# EAGLE board MaTouch ESP32-P4 TFT with Touch 10.1“ V1.0 (EAGLE 6.1), part 1 of 3
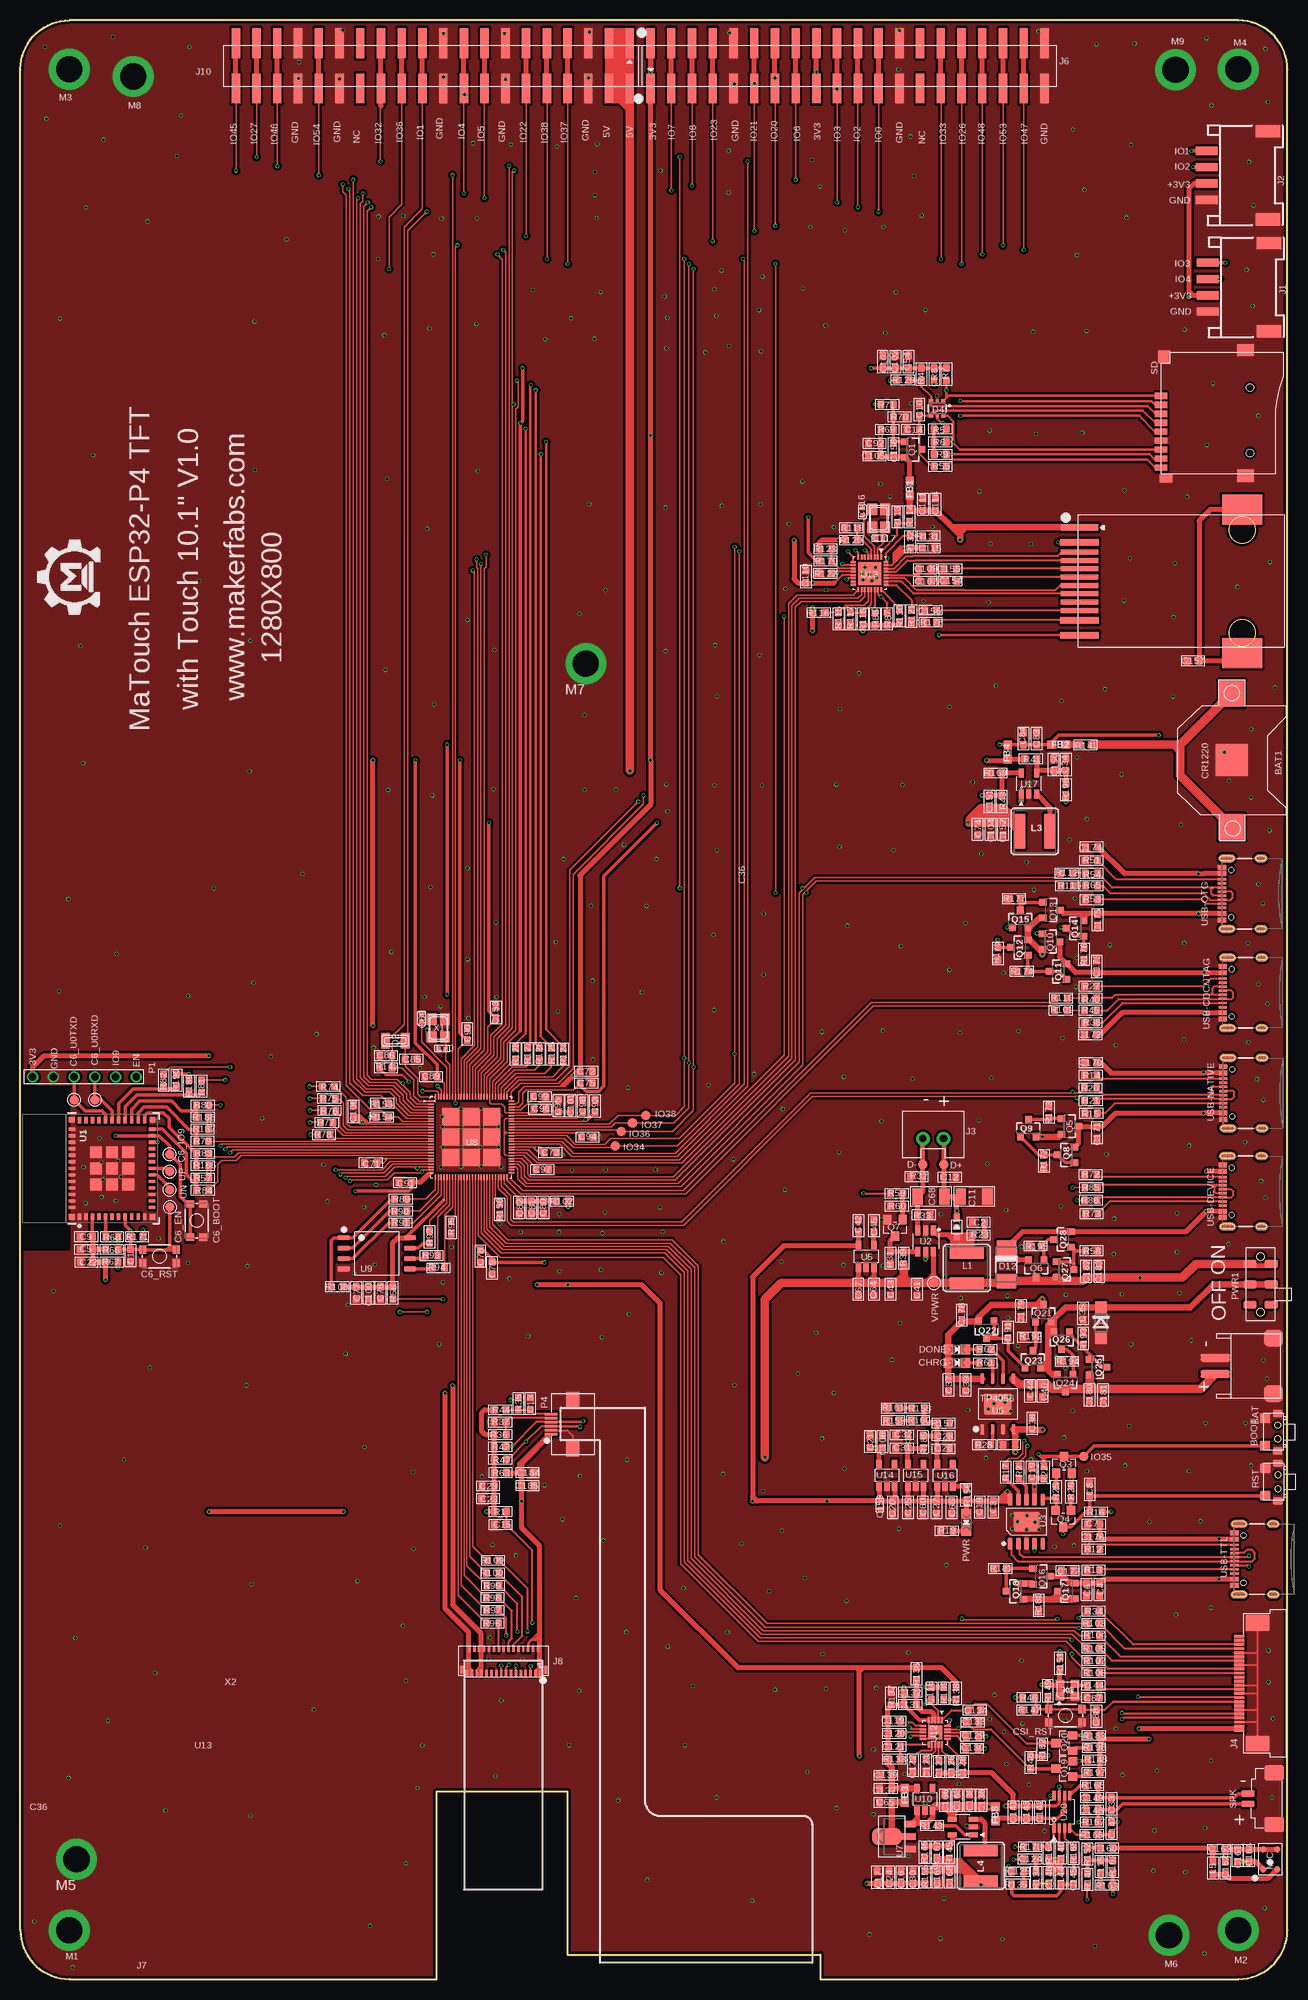
[diagram p0: board, top side]
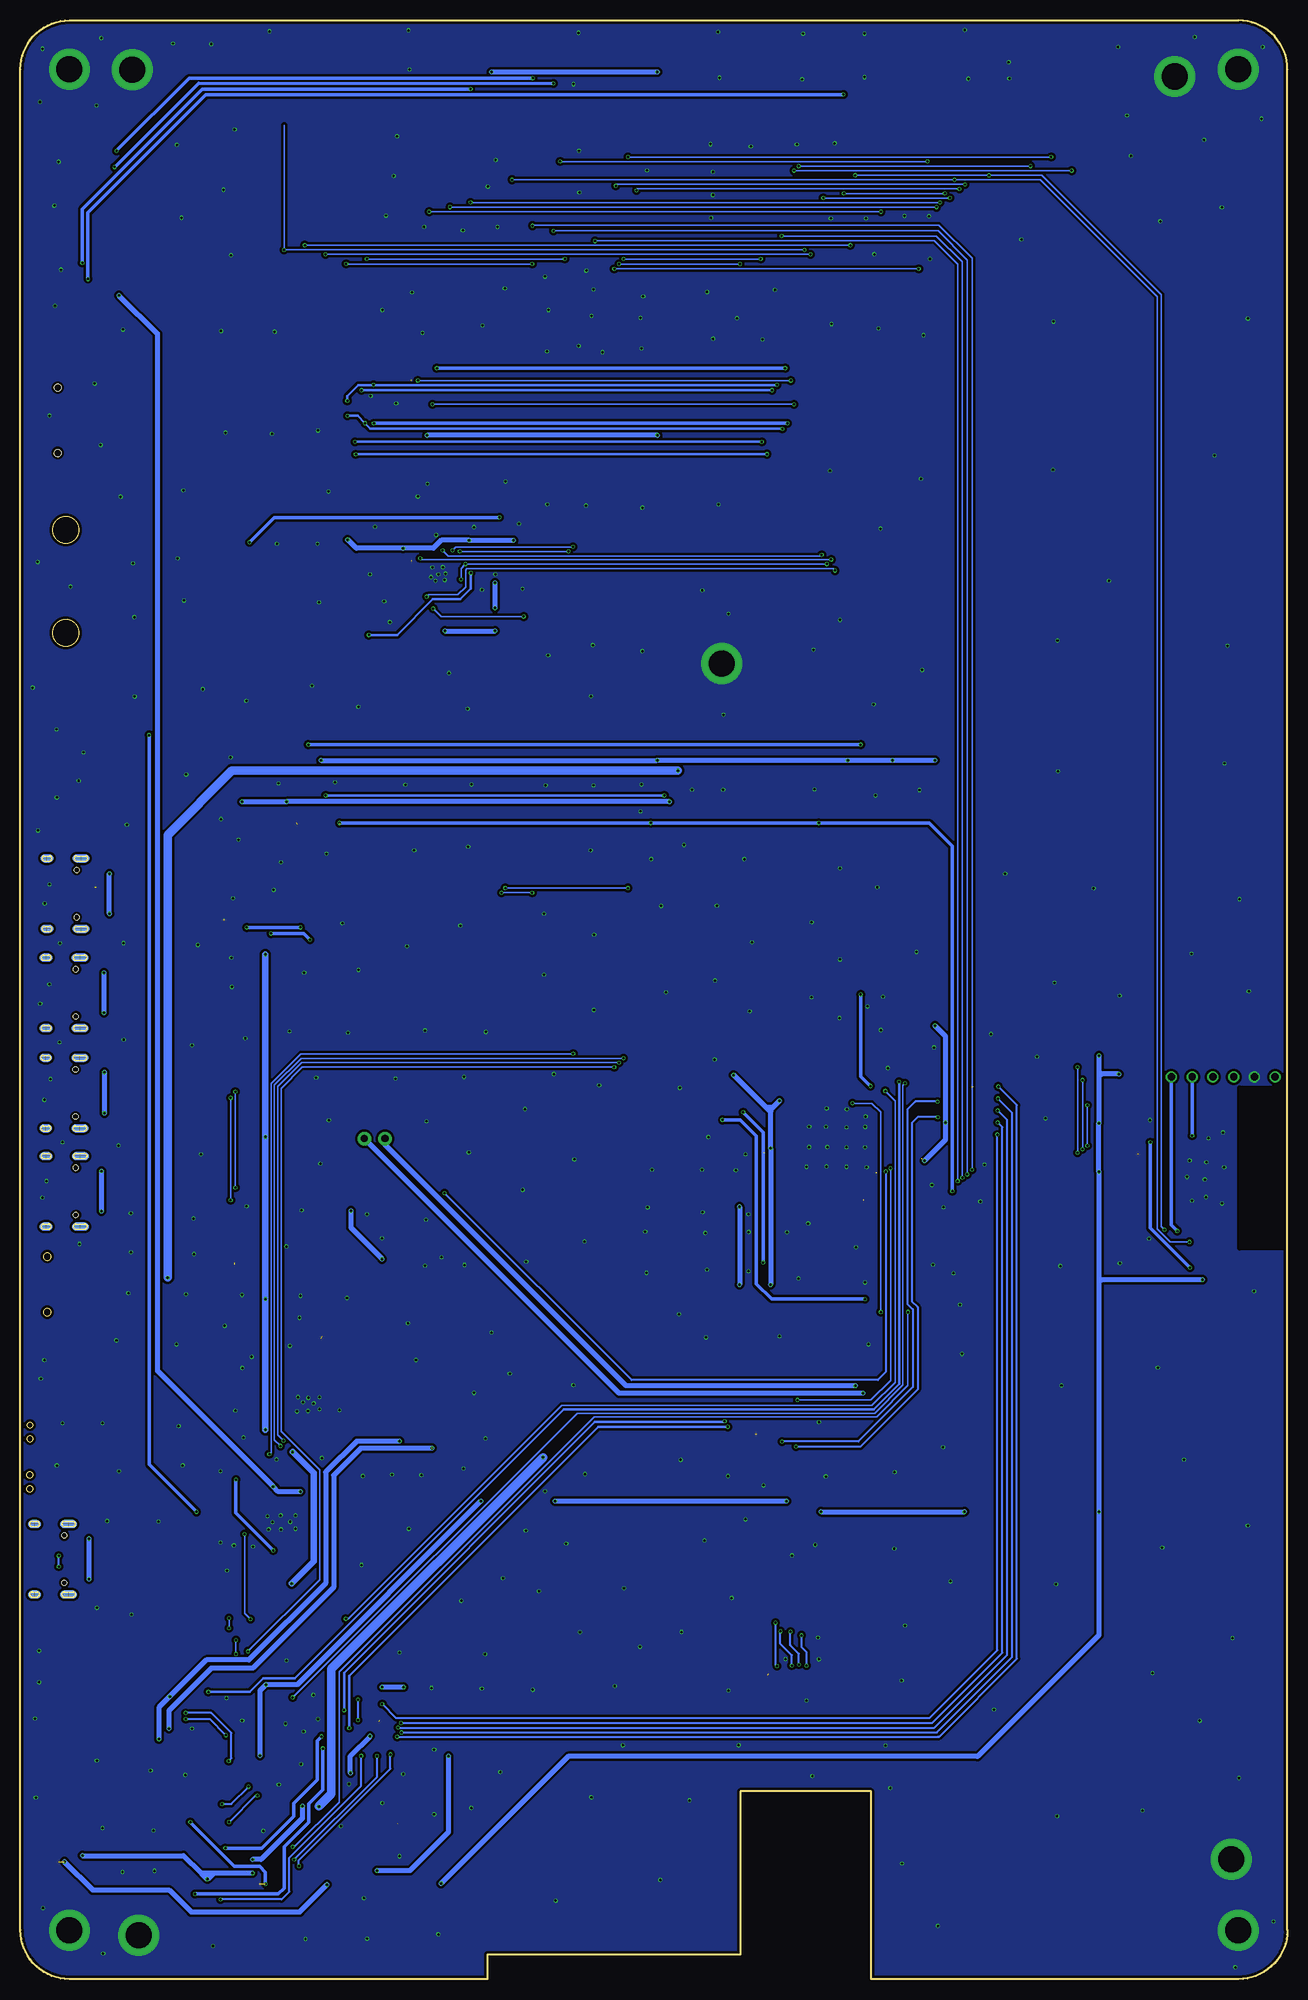
[diagram p1: board, bottom side, seen from below]

Size 155.2 x 240 mm. Coordinates in mm from the lower left corner, seen from the top.
Outline: 67,23 51,23 51,0 6,0 arc-90 0,6 0,234 arc-90 6,240 149.2,240 arc-90 155.2,234 155.2,6 arc-90 149.2,0 98,0 98,3 67,3 67,22.96
Copper layers (1*16): Top 0.035mm / dielectric 1.5mm / Bottom 0.035mm
Design rules: minimum track width 7mil, minimum drill 10mil, track to track 6mil, track to pad 6mil, pad to pad 6mil, via to via 6mil, smd to smd 0mil, copper to edge 6mil, drill to drill 6mil, minimum pad ring 3mil, minimum via ring 3mil, stop-mask expansion 2mil, vias tented up to drill 100mil, thermal gap 0mil
Net classes: 0 default: drill 0.305 mm; 1 vbat: drill 0.305 mm
tRestrict: area 0.1,89.6 to 5.8,109.2
bRestrict: area 0.1,89.6 to 5.8,109.2

## Footprints (pad centres in the part's own frame; a part is rotated, then mirrored left to right if it is on the bottom)
HW2-SMD-2.0-90D = smd 2 x 2.4: 3 3.4,-2.181; 4 -3.4,-2.181 | smd 1 x 3.6: + -1,4.953; - 1,4.953
CR1220-SMD = smd 3.2 x 3.2: +$1 -8.2,0; +$2 8.2,0 | smd 3.9 x 3.9: - 0,0
2*4*3.5MM = smd 1.15 x 1.3: 1 -1.675,0; 2 1.675,0 | smd 0.9 x 1.2: 3 2.3,1.55; 4 -2.3,1.55
C0603 = smd 0.889 x 0.889: 1 -0.762,0; 2 0.762,0
DISCRETE_C0603 = smd 0.889 x 0.889: 1 -0.762,0; 2 0.762,0
TACTILE_SWITCH_SMD_4.6X2.8MM = smd 0.9 x 1: 1 -2.05,-0.8; 2 2.05,-0.8; 3 2.05,0.8; 4 -2.05,0.8
TP_4545 = smd 1.143 x 1.143: T 0,0
DISCRETE_C1206 = smd 1.27 x 2.032: 1 -1.651,0; 2 1.651,0
DISCRETE_C0402 = smd 0.635 x 0.635: 1 -0.445,0; 2 0.445,0
C0402 = smd 0.635 x 0.635: 1 0,0.484; 2 0,-0.484
C0603' = smd 0.889 x 0.889: 1 0,0.762; 2 0,-0.762
CHIPLED_0805_NOOUTLINE = smd 1.2 x 1.2: A 0,-1.05; C 0,1.05
SOD323 = smd 1 x 0.8: + -1.2,0; - 1.2,0
SOD123 = smd 1.4 x 1.4: A 1.9,0; C -1.9,0
SOT363 = smd 0.5 x 0.5: 1 -0.75,-0.9; 3 0.75,-0.9; 4 0.75,0.9; 6 -0.75,0.9 | smd 0.4 x 0.5: 2 0,-0.9; 5 0,0.9
DO-214AC = smd 1.8 x 2.4: A 2.025,0; C -2.025,0
TP-D45MIL = smd 1.143 x 1.143: T 0,0
0603 = smd 1.1 x 1: 1 -0.85,0; 2 0.85,0
HW4-SMD-2.0-90D = smd 1.01 x 2.74: 1 -3,-0.1; 2 -1,-0.1; 3 1,-0.1; 4 3,-0.1 | smd 1.5 x 3: SS1 -5.4,7.4; SS2 5.4,7.4
XH2.54-2P = drill 0.9 pad 1.651: 1 -1.27,0; 2 1.27,0
SMD26-50P-1760L450W = smd 0.3 x 1.3: 1 5.75,0; 2 5.25,0; 3 4.75,0; 4 4.25,0; 5 3.75,0; 6 3.25,0; 7 2.75,0; 8 2.25,0; 9 1.75,0; 10 1.25,0; 11 0.75,0; 12 0.25,0; 13 -0.25,0; 14 -0.75,0; 15 -1.25,0; 16 -1.75,0; 17 -2.25,0; 18 -2.75,0; 19 -3.25,0; 20 -3.75,0; 21 -4.25,0; 22 -4.75,0; 23 -5.25,0; 24 -5.75,0 | smd 2 x 3: 25 -7.4,-2.25; 26 7.4,-2.25
SMD2X20-254P-5080L750W920H = smd 1.02 x 3.65: 1 -24.13,-2.775; 2 -24.13,2.775; 3 -21.59,-2.775; 4 -21.59,2.775; 5 -19.05,-2.775; 6 -19.05,2.775; 7 -16.51,-2.775; 8 -16.51,2.775; 9 -13.97,-2.775; 10 -13.97,2.775; 11 -11.43,-2.775; 12 -11.43,2.775; 13 -8.89,-2.775; 14 -8.89,2.775; 15 -6.35,-2.775; 16 -6.35,2.775; 17 -3.81,-2.775; 18 -3.81,2.775; 19 -1.27,-2.775; 20 -1.27,2.775; 21 1.27,-2.775; 22 1.27,2.775; 23 3.81,-2.775; 24 3.81,2.775; 25 6.35,-2.775; 26 6.35,2.775; 27 8.89,-2.775; 28 8.89,2.775; 29 11.43,-2.775; 30 11.43,2.775; 31 13.97,-2.775; 32 13.97,2.775; 33 16.51,-2.775; 34 16.51,2.775; 35 19.05,-2.775; 36 19.05,2.775; 37 21.59,-2.775; 38 21.59,2.775; 39 24.13,-2.775; 40 24.13,2.775
HR961160C = smd 0.81 x 4.6: 1 -6.61,-9.961 | smd 0.81 x 4.77: 2 -4.77,-9.961; 11 4.77,-9.961; 12 6.61,-9.961 | smd 0.61 x 4.6: 3 -3.57,-9.961; 4 -2.55,-9.961; 5 -1.53,-9.961; 6 -0.51,-9.961; 7 0.51,-9.961; 8 1.53,-9.961; 9 2.55,-9.961; 10 3.57,-9.961 | smd 3.7 x 4.9: 13 8.799,9.961; 14 -8.799,9.961
SMD31-30P-1090L320W100H = smd 0.3 x 0.8: 1 4.5,-1.475; 3 3.9,-1.475; 5 3.3,-1.475; 7 2.7,-1.475; 9 2.1,-1.475; 11 1.5,-1.475; 13 0.9,-1.475; 15 0.3,-1.475; 17 -0.3,-1.475; 19 -0.9,-1.475; 21 -1.5,-1.475; 23 -2.1,-1.475; 25 -2.7,-1.475; 27 -3.3,-1.475; 29 -3.9,-1.475; 31 -4.5,-1.475 | smd 0.3 x 0.65: 2 4.2,1.4; 4 3.6,1.4; 6 3,1.4; 8 2.4,1.4; 10 1.8,1.4; 12 1.2,1.4; 14 0.6,1.4; 16 0,1.4; 18 -0.6,1.4; 20 -1.2,1.4; 22 -1.8,1.4; 24 -2.4,1.4; 26 -3,1.4; 28 -3.6,1.4; 30 -4.2,1.4 | smd 0.4 x 0.95: 32 5.15,-1.103; 33 -5.15,-1.103
CR54 = smd 4.2 x 1.4: P$1 0,1.85; P$2 0,-1.85
L0603 = smd 0.889 x 0.889: 1 -0.762,0; 2 0.762,0
M2.5 = drill 3.2 pad 5: 1 0,0
MIC4-SMD-3.76X2.95MM = smd 0.8 x 0.8: 1 0.85,1.23; 2 0.85,-1.23; 3 -0.85,-1.23; 4 -0.85,1.23
DEBUG*6 = drill 0.9: 1 0,0; 2 0,2.54; 3 0,5.08; 4 0,7.62; 5 0,10.16; 6 0,12.7
SMD8-50P-740L535W = smd 0.3 x 1.5: 1 -1.25,0; 2 -0.75,0; 3 -0.25,0; 4 0.25,0; 5 0.75,0; 6 1.25,0 | smd 2 x 1.6: 7 2.95,-2.68; 8 -2.95,-2.68
SMD-6-2.5MM = smd 1 x 1.6: 1 -2.5,1.3; 1@1 -2.5,-1.3; 2 0,1.3; 2@1 0,-1.3; 3 2.5,1.3; 3@1 2.5,-1.3
SOT23-3 = smd 0.8 x 0.9: 1 -0.95,-1; 2 0.95,-1; 3 0,1.1
XTAL3215 = smd 1.1 x 1.9: P$1 1.2,0; P$2 -1.2,0
SOT23 = smd 1.016 x 1.143: 1 -0.95,-1.016; 2 0.95,-1.016; 3 0,1.016
DISCRETE_R0603 = smd 0.889 x 0.889: 1 -0.762,0; 2 0.762,0
R0603 = smd 0.889 x 0.889: 1 -0.762,0; 2 0.762,0
9P-SMD-W/-RING = smd 1.524 x 0.762: 1 0,4.4; 2 0,3.3; 3 0,2.2; 4 0,1.1; 5 0,0; 6 0,-1.1; 7 0,-2.2; 8 0,-3.3; 9 0,-4.4 | smd 1.524 x 1.016: G1 0.6,-5.746 | smd 2.032 x 1.524: G2 10.373,-5.4; G3 10.373,10 | smd 1.524 x 1.524: G4 0.392,9.181 | hole 0.889: 10.9,-2.6; 10.9,5.4
1X2P-SMT1.25MM = smd 0.8 x 1.6: 1 -0.625,0; 2 0.625,0 | smd 1.8 x 2.4: 3 3.175,-3.2; 4 -3.175,-3.2
ESP32-C6-MINI-1 = smd 0.8 x 0.4: 1 -5.9,4; 2 -5.9,3.2; 3 -5.9,2.4; 4 -5.9,1.6; 5 -5.9,0.8; 6 -5.9,0; 7 -5.9,-0.8; 8 -5.9,-1.6; 9 -5.9,-2.4; 10 -5.9,-3.2; 11 -5.9,-4; 25 5.9,-4; 26 5.9,-3.2; 27 5.9,-2.4; 28 5.9,-1.6; 29 5.9,-0.8; 30 5.9,0; 31 5.9,0.8; 32 5.9,1.6; 33 5.9,2.4; 34 5.9,3.2; 35 5.9,4 | smd 0.4 x 0.8: 12 -4.8,-4.9; 13 -4,-4.9; 14 -3.2,-4.9; 15 -2.4,-4.9; 16 -1.6,-4.9; 17 -0.8,-4.9; 18 0,-4.9; 19 0.8,-4.9; 20 1.6,-4.9; 21 2.4,-4.9; 22 3.2,-4.9; 23 4,-4.9; 24 4.8,-4.9; 36 4.8,4.9; 37 4,4.9; 38 3.2,4.9; 39 2.4,4.9; 40 1.6,4.9; 41 0.8,4.9; 42 0,4.9; 43 -0.8,4.9; 44 -1.6,4.9; 45 -2.4,4.9; 46 -3.2,4.9; 47 -4,4.9; 48 -4.8,4.9 | smd 1.45 x 1.45: 49.1 -1.975,1.975; 49.2 -1.975,0; 49.3 -1.975,-1.975; 49.4 0,-1.975; 49.5 1.975,-1.975; 49.6 1.975,0; 49.7 1.975,1.975; 49.8 0,1.975; 49.9 0,0 | smd 0.7 x 0.7: 50 5.95,4.95; 51 5.95,-4.95; 52 -5.95,-4.95; 53 -5.95,4.95
SOT23-6 = smd 1.2 x 0.6: 1 -1.3,0.95; 2 -1.3,0; 3 -1.3,-0.95; 4 1.3,-0.95; 5 1.3,0; 6 1.3,0.95
ESOP-10-EP-150MIL = smd 1.5 x 0.6: 1 -2.7,2; 2 -2.7,1; 3 -2.7,0; 4 -2.7,-1; 5 -2.7,-2; 6 2.7,-2; 7 2.7,-1; 8 2.7,0; 9 2.7,1; 10 2.7,2 | smd 2.4 x 3.2: EP 0,0
SOT23-5 = smd 0.69 x 1.2: 1 -0.95,-1.3; 2 0,-1.3; 3 0.95,-1.3; 4 0.95,1.3; 5 -0.95,1.3
SOP8-1.27P = smd 1.27 x 0.51: 1 -3.1,1.905; 2 -3.1,0.635; 3 -3.1,-0.635; 4 -3.1,-1.905; 5 3.1,-1.905; 6 3.1,-0.635; 7 3.1,0.635; 8 3.1,1.905 | smd 2.5 x 3.4: 9 0,0
SOT89 = smd 0.8 x 1.4: 1 -1.524,-1.905; 3 1.524,-1.905 | smd 0.8 x 1.9: 2 0,-1.651 | smd 2.032 x 3.65: 4 0,0.94
QFN105-35P-500L500W = smd 0.65 x 0.18: 1 -4.925,4.375; 2 -4.925,4.025; 3 -4.925,3.675; 4 -4.925,3.325; 5 -4.925,2.975; 6 -4.925,2.625; 7 -4.925,2.275; 8 -4.925,1.925; 9 -4.925,1.575; 10 -4.925,1.225; 11 -4.925,0.875; 12 -4.925,0.525; 13 -4.925,0.175; 14 -4.925,-0.175; 15 -4.925,-0.525; 16 -4.925,-0.875; 17 -4.925,-1.225; 18 -4.925,-1.575; 19 -4.925,-1.925; 20 -4.925,-2.275; 21 -4.925,-2.625; 22 -4.925,-2.975; 23 -4.925,-3.325; 24 -4.925,-3.675; 25 -4.925,-4.025; 26 -4.925,-4.375; 53 4.925,-4.375; 54 4.925,-4.025; 55 4.925,-3.675; 56 4.925,-3.325; 57 4.925,-2.975; 58 4.925,-2.625; 59 4.925,-2.275; 60 4.925,-1.925; 61 4.925,-1.575; 62 4.925,-1.225; 63 4.925,-0.875; 64 4.925,-0.525; 65 4.925,-0.175; 66 4.925,0.175; 67 4.925,0.525; 68 4.925,0.875; 69 4.925,1.225; 70 4.925,1.575; 71 4.925,1.925; 72 4.925,2.275; 73 4.925,2.625; 74 4.925,2.975; 75 4.925,3.325; 76 4.925,3.675; 77 4.925,4.025; 78 4.925,4.375 | smd 0.18 x 0.65: 27 -4.375,-4.925; 28 -4.025,-4.925; 29 -3.675,-4.925; 30 -3.325,-4.925; 31 -2.975,-4.925; 32 -2.625,-4.925; 33 -2.275,-4.925; 34 -1.925,-4.925; 35 -1.575,-4.925; 36 -1.225,-4.925; 37 -0.875,-4.925; 38 -0.525,-4.925; 39 -0.175,-4.925; 40 0.175,-4.925; 41 0.525,-4.925; 42 0.875,-4.925; 43 1.225,-4.925; 44 1.575,-4.925; 45 1.925,-4.925; 46 2.275,-4.925; 47 2.625,-4.925; 48 2.975,-4.925; 49 3.325,-4.925; 50 3.675,-4.925; 51 4.025,-4.925; 52 4.375,-4.925; 79 4.375,4.925; 80 4.025,4.925; 81 3.675,4.925; 82 3.325,4.925; 83 2.975,4.925; 84 2.625,4.925; 85 2.275,4.925; 86 1.925,4.925; 87 1.575,4.925; 88 1.225,4.925; 89 0.875,4.925; 90 0.525,4.925; 91 0.175,4.925; 92 -0.175,4.925; 93 -0.525,4.925; 94 -0.875,4.925; 95 -1.225,4.925; 96 -1.575,4.925; 97 -1.925,4.925; 98 -2.275,4.925; 99 -2.625,4.925; 100 -2.975,4.925; 101 -3.325,4.925; 102 -3.675,4.925; 103 -4.025,4.925; 104 -4.375,4.925 | smd 2.1 x 2.1: 105 0,0; 106 -2.5,0; 107 2.5,0; 108 2.5,2.5; 109 0,2.5; 110 -2.5,2.5; 111 -2.5,-2.5; 112 0,-2.5; 113 2.5,-2.5
SOIC-8-208MIL = smd 1.5 x 0.635: 1 -4.05,1.905; 2 -4.05,0.635; 3 -4.05,-0.635; 4 -4.05,-1.905; 5 4.05,-1.905; 6 4.05,-0.635; 7 4.05,0.635; 8 4.05,1.905
SOT23-5-95P-300L300W = smd 1.1 x 0.6: 1 -1.3,0.95; 2 -1.3,0; 3 -1.3,-0.95; 4 1.3,-0.95; 5 1.3,0.95
QFN20-40P-300L300W55H = smd 0.8 x 0.25: 1 -1.5,0.8; 2 -1.5,0.4; 3 -1.5,0; 4 -1.5,-0.4; 5 -1.5,-0.8; 11 1.5,-0.8; 12 1.5,-0.4; 13 1.5,0; 14 1.5,0.4; 15 1.5,0.8 | smd 0.25 x 0.8: 6 -0.8,-1.5; 7 -0.4,-1.5; 8 0,-1.5; 9 0.4,-1.5; 10 0.8,-1.5; 16 0.8,1.5; 17 0.4,1.5; 18 0,1.5; 19 -0.4,1.5; 20 -0.8,1.5 | smd 1.7 x 1.7: 21 0,0
QFN32-40P-400W400L = smd 0.6 x 0.25: 1 -2,1.4; 2 -2,1; 3 -2,0.6; 4 -2,0.2; 5 -2,-0.2; 6 -2,-0.6; 7 -2,-1; 8 -2,-1.4; 17 2,-1.4; 18 2,-1; 19 2,-0.6; 20 2,-0.2; 21 2,0.2; 22 2,0.6; 23 2,1; 24 2,1.4 | smd 0.25 x 0.6: 9 -1.4,-2; 10 -1,-2; 11 -0.6,-2; 12 -0.2,-2; 13 0.2,-2; 14 0.6,-2; 15 1,-2; 16 1.4,-2; 25 1.4,2; 26 1,2; 27 0.6,2; 28 0.2,2; 29 -0.2,2; 30 -0.6,2; 31 -1,2; 32 -1.4,2 | smd 2.8 x 2.8: 33 0,0
MSOP8-65P-490L300W110H = smd 1.2 x 0.38: 1 -2,0.975; 2 -2,0.325; 3 -2,-0.325; 4 -2,-0.975; 5 2,-0.975; 6 2,-0.325; 7 2,0.325; 8 2,0.975
USB-C-16P-5 = smd 0.3 x 1: A5 -1.25,-0.34; A6 -0.25,-0.34; A7 0.25,-0.34; A8 1.25,-0.34; B5 1.75,-0.34; B6 0.75,-0.34; B7 -0.75,-0.34; B8 -1.75,-0.34 | smd 0.6 x 1: GND -3.225,-0.34; GND2 3.225,-0.34; VBUS1 -2.45,-0.34; VBUS2 2.45,-0.34 | smd 1 x 2.1: SHLD1 -4.32,-0.915; SHLD2 4.32,-0.915 | smd 1 x 2.1 bottom: SHLD3 -4.32,-0.915; SHLD4 4.32,-0.915 | smd 1 x 1.6: SHLD5 -4.32,-5.095; SHLD8 4.32,-5.095 | smd 1 x 1.6 bottom: SHLD6 -4.32,-5.095; SHLD7 4.32,-5.095 | hole 0.65: -2.89,-1.445; 2.89,-1.445
NX3225 = smd 1.4 x 1.2: 1 -1.1,-0.8; 2 1.1,-0.8; 3 1.1,0.8; 4 -1.1,0.8
OSC4-SMD-2.5X2.0X0.8MM = smd 1 x 0.95: 1 -0.925,-0.775; 2 0.925,-0.775; 3 0.925,0.775; 4 -0.925,0.775

## Placement (x,y rotation side)
BAT  JST-2P  [HW2-SMD-2.0-90D]  151.32,75.13 90 top
BAT1  [CR1220-SMD]  148.39,149.35 270 top
BOOT  TS24CA  [2*4*3.5MM]  152.48,67.04 270 top
C1  1uF/16V  [C0603]  13.49,88.65 270 top
C2  10pF/50V  [DISCRETE_C0603]  117.37,92.74 0 top
C3  10uF  [DISCRETE_C0603]  119.18,57.84 90 top
C4  10uF  [DISCRETE_C0603]  132.21,47.73 90 top
C5  10uF  [C0603]  8.08,89.41 180 top
C6  10uF  [DISCRETE_C0603]  130.58,47.73 90 top
C6_BOOT  MOMENTARY-SWITCH-SPST-SMD-4.6X2.8MM  [TACTILE_SWITCH_SMD_4.6X2.8MM]  21.59,92.94 90 top
C6_EN  [TP_4545]  18.31,94.59 90 top
C6_IO9  [TP_4545]  18.29,101.07 90 top
C6_RST  MOMENTARY-SWITCH-SPST-SMD-4.6X2.8MM  [TACTILE_SWITCH_SMD_4.6X2.8MM]  17.04,88.57 0 top
C6_U0RXD  [TP_4545]  9.12,107.72 90 top
C6_U0TXD  [TP_4545]  6.58,107.72 90 top
C7  0.1uF  [DISCRETE_C0603]  131.47,55.73 0 top
C8  0.1uF  [DISCRETE_C0603]  130.99,59.99 270 top
C9  0.1uF  [C0603]  8.08,90.98 180 top
C10  10uF  [DISCRETE_C0603]  110.11,192.3 270 top
C11  4.7uF/35V  [DISCRETE_C1206]  116.84,95.89 180 top
C12  0.1uF/50V  [DISCRETE_C0603]  113.84,98.27 180 top
C13  NC  [DISCRETE_C0603]  62.46,70.51 270 top
C14  0.1uF  [DISCRETE_C0603]  109.35,189.87 0 top
C15  100nF  [DISCRETE_C0603]  58.8,55.68 0 top
C16  10uF  [DISCRETE_C0603]  107.9,12.47 270 top
C17  0.1uF  [DISCRETE_C0603]  104.95,12.47 270 top
C18  0.1uF  [DISCRETE_C0603]  117.53,57.84 90 top
C19  0.1uF  [DISCRETE_C0603]  123.88,62.1 270 top
C20  4.7uF/16V  [C0603]  106.86,57.81 270 top
C21  10uF  [C0603]  104.06,65.86 90 top
C22  10uF  [C0603]  8.09,87.85 180 top
C23  10uF  [DISCRETE_C0603]  57.27,58.86 0 top
C24  0.1uF  [DISCRETE_C0603]  106.42,12.47 270 top
C25  4.7uF/16V  [C0603]  108.74,57.81 270 top
C26  0.1uF  [DISCRETE_C0603]  113.08,64.97 180 top
C27  4.7uF/16V  [C0603]  112.24,57.81 270 top
C28  10uF  [C0603]  113.08,66.57 0 top
C29  10uF  [DISCRETE_C0603]  57.29,60.43 0 top
C30  0.1uF  [DISCRETE_C0603]  109.35,12.49 270 top
C31  10uF  [C0603]  107.98,65.05 180 top
C32  0.1uF  [DISCRETE_C0603]  107.98,66.67 0 top
C33  330pF/50V  [C0603]  133.65,21.46 90 top
C34  10uF  [C0603]  128.07,148.82 90 top
C35  10uF  [C0603]  130.18,81.56 90 top
C36  10uF  [C0603]  121.11,65.51 0 top
C37  0.1uF  [C0603]  113.69,72.8 270 top
C38  10uF  [C0603]  123.95,68.07 90 top
C39  0.1uF  [C0603]  115.77,72.8 270 top
C40  10uF  [C0603]  125.22,72.09 270 top
C41  4.7uF/16V  [C0603]  109.83,84.53 270 top
C42  10uF  [C0603]  102.67,92.3 90 top
C43  10uF  [C0603]  106.58,84.53 90 top
C44  0.1uF  [C0603]  123.67,72.09 270 top
C45  NC  [C0603]  104.55,92.3 90 top
C54  10uF  [DISCRETE_C0603]  108.78,198.17 270 top
C60  0.1uF  [DISCRETE_C0603]  110.54,57.81 90 top
C64  4.7uF/16V  [C0603]  104.55,84.53 270 top
C65  10uF  [C0603]  105.99,21.64 180 top
C66  0.1uF  [DISCRETE_C0603]  114.07,57.81 90 top
C67  0.1uF  [C0603]  102.64,84.53 90 top
C68  NC  [DISCRETE_C1206]  111.56,95.89 0 top
C69  12pF  [DISCRETE_C0402]  49.15,117.73 90 top
C70  12pF  [DISCRETE_C0402]  51.64,114.02 0 top
C71  10uF  [C0603]  42.9,100.03 180 top
C72  0.1uF  [C0603]  69.32,111.23 0 top
C73  0.1uF  [C0603]  64.92,101.27 0 top
C74  10uF  [C0603]  117.25,140.89 270 top
C75  0.1uF  [C0603]  69.32,109.75 0 top
C76  10uF  [C0603]  44.12,84.07 270 top
C77  0.1uF  [C0603]  41.12,84.07 270 top
C78  10uF  [C0603]  56.34,88.57 270 top
C79  0.1uF  [C0603]  57.78,87.12 270 top
C80  10uF  [C0603]  64.08,94.56 270 top
C81  0.1uF  [C0603]  62.59,94.56 270 top
C82  10nF  [C0603]  61.09,94.56 270 top
C83  10uF  [C0603]  124.49,152.02 90 top
C84  0.1uF  [C0603]  122.86,152.02 90 top
C85  20pF  [DISCRETE_C0603]  47.88,112.7 0 top
C86  20pF  [DISCRETE_C0603]  44.78,113.16 180 top
C87  15pF  [DISCRETE_C0603]  131.42,34.49 0 top
C88  15pF  [DISCRETE_C0603]  131.8,32.21 90 top
C89  10uF  [C0603]  50.29,110.57 180 top
C90  0.1uF  [C0603]  54.74,115.8 90 top
C91  0.1uF  [C0603]  47.12,97.59 180 top
C92  0.1uF  [C0603]  104.62,188.16 180 top
C93  1uF/16V  [C0603]  70.41,106.98 90 top
C94  1uF/16V  [C0603]  69.47,103.15 0 top
C95  1uF/16V  [C0603]  65.91,107.01 90 top
C96  1uF/16V  [C0603]  63.65,106.6 0 top
C97  10uF  [C0603]  63.93,99.19 0 top
C98  0.1uF  [C0603]  68.88,106.98 90 top
C99  0.1uF  [C0603]  63.6,108.1 0 top
C100  0.1uF  [C0603]  42.62,84.07 270 top
C101  1uF  [C0603]  67.39,107.01 90 top
C102  10uF  [C0603]  107.21,198.17 90 top
C103  0.1uF  [C0603]  105.64,198.17 90 top
C104  0.1uF  [C0603]  118.85,140.89 270 top
C105  0.1uF  [C0603]  104.62,186.61 180 top
C106  0.1uF  [C0603]  40.82,106.32 90 top
C107  10uF  [C0603]  110.85,171.3 0 top
C108  0.1uF  [DISCRETE_C0603]  105.59,65.86 270 top
C109  0.1uF  [C0603]  110.85,172.8 0 top
C110  10uF  [C0603]  96.22,171.83 90 top
C111  0.1uF  [C0603]  110.57,180.7 90 top
C114  10uF  [C0603]  112.09,180.7 90 top
C115  0.1uF  [C0603]  111.25,175.34 0 top
C116  12pF  [DISCRETE_C0402]  103.15,179.81 90 top
C117  12pF  [DISCRETE_C0402]  105.23,176.56 0 top
C118  22pF  [C0603]  111.61,35 90 top
C119  22pF  [C0603]  107.04,31.62 180 top
C120  22pF  [C0603]  107.04,30.1 180 top
C121  1uF/16V  [C0603]  107.04,28.5 180 top
C122  22pF  [C0603]  109.32,26.21 270 top
C123  22pF  [C0603]  110.92,26.19 270 top
C124  1uF/16V  [C0603]  123.65,14.71 0 top
C125  1uF/16V  [C0603]  122.17,13.16 0 top
C126  1uF/16V  [C0603]  114.02,26.04 90 top
C127  1uF/16V  [C0603]  112.52,26.04 90 top
C128  1uF/16V  [C0603]  115.49,26.04 270 top
C129  1uF/16V  [C0603]  116.61,29.74 0 top
C130  1uF/16V  [C0603]  116.56,28.27 0 top
C131  0.1uF  [C0603]  109.02,33.63 180 top
C132  0.1uF  [C0603]  109.02,35.15 180 top
C133  22pF  [C0603]  116.66,31.47 0 top
C134  22pF  [C0603]  116.89,32.94 0 top
C135  1uF/16V  [C0603]  132.31,13.79 270 top
C136  4.7uF/16V  [C0603]  116.26,21.92 90 top
C137  10uF  [C0603]  105.99,23.34 180 top
C138  0.1uF  [C0603]  117.75,21.92 270 top
C139  0.1uF  [C0603]  105.99,24.97 0 top
C140  1uF/16V  [C0603]  127.46,15.44 270 top
C141  1uF/16V  [C0603]  121.64,20.45 90 top
C142  10uF  [C0603]  124.89,20.45 90 top
C143  0.1uF  [C0603]  123.29,20.45 90 top
C144  22pF  [C0603]  127.46,12.4 90 top
C145  0.1uF  [C0603]  129.01,12.4 90 top
C146  22pF  [C0603]  125.96,12.42 90 top
C147  0.1uF  [C0603]  133.65,18.47 270 top
C148  330pF/50V  [C0603]  131.27,20.75 180 top
C149  330pF/50V  [C0603]  131.27,22.23 0 top
C150  0.1uF  [C0603]  126.57,148.82 270 top
C151  22pF  [C0603]  118.69,144.27 90 top
C152  10uF  [C0603]  120.37,140.89 270 top
C153  0.1uF  [C0603]  58.27,118.44 270 top
C154  0.1uF  [C0603]  113.92,171.3 180 top
C155  0.1uF  [C0603]  113.89,172.8 180 top
C156  1nF/50V  [C0603]  111.48,167.74 180 top
C157  1nF/50V  [C0603]  143.64,161.52 180 top
C158  0.1uF  [DISCRETE_C0603]  106.93,187.45 270 top
C159  100nF  [C0402]  105.28,58.09 180 top
C160  10uF  [C0603']  133.07,16.08 270 top
C161  10uF  [C0603']  149.07,15.14 0 top
C162  33pF  [C0603']  147.6,13.61 180 top
C163  33pF  [C0603']  146.84,15.9 90 top
C164  100nF  [C0603']  150.52,15.14 180 top
C165  10uF  [C0603]  114.76,21.92 90 top
C166  0.1uF  [C0603]  113.28,21.92 270 top
C167  22pF  [C0603]  112.27,15.52 90 top
C168  10uF  [C0603]  113.82,12.5 270 top
C169  0.1uF  [C0603]  112.32,12.5 90 top
C170  10uF  [C0603]  131.11,112.29 180 top
C171  0.1uF  [C0603]  131.88,103.71 270 top
C172  10uF  [C0603]  131.06,115.72 180 top
C173  0.1uF  [C0603]  131.85,124.08 90 top
C174  10uF  [C0603]  131.22,138.73 180 top
C175  0.1uF  [C0603]  131.95,129.79 270 top
C176  10uF  [C0603]  131.47,54.2 180 top
C177  0.1uF  [C0603]  128.27,50.06 0 top
C178  10uF  [C0603]  115.32,81.36 90 top
C179  0.1uF  [C0603]  122.58,81.86 270 top
C180  10uF  [C0603]  130.96,71.58 270 top
C181  0.1uF  [C0603]  132.64,71.58 270 top
C182  10uF  [C0603]  130.56,86.72 90 top
C183  0.1uF  [C0603]  132.16,86.72 90 top
C184  4.7uF/16V  [C0603]  62.13,62.05 0 top
C185  0.1uF  [DISCRETE_C0603]  62.13,60.48 180 top
CHRG  CHRG  [CHIPLED_0805_NOOUTLINE]  114.73,75.49 270 top
CSI_RST  MOMENTARY-SWITCH-SPST-SMD-4.6X2.8MM  [TACTILE_SWITCH_SMD_4.6X2.8MM]  128.02,32.28 0 top
D1  1N4148WS  [SOD323]  114.71,92.15 90 top
D3  W8/5.1V  [SOD123]  132.36,80.42 270 top
D4  SMF05C  [SOT363]  112.3,192.45 180 top
D12  SS54  [DO-214AC]  120.78,87.55 270 top
D+  [TP-D45MIL]  113.08,99.8 180 top
D-  [TP-D45MIL]  110.54,99.8 180 top
DONE  GREEN  [CHIPLED_0805_NOOUTLINE]  114.73,77.14 270 top
FB1  [0603]  108.94,182.68 90 top
FB2  [0603]  127.18,151.26 180 top
FB3  [0603]  108.33,22.5 90 top
FB4  [0603]  120.95,150.34 90 top
FB5  [0603]  119.46,20.24 90 top
IO34  [TP-D45MIL]  72.9,102.11 270 top
IO35  [TP-D45MIL]  130.25,64.06 90 top
IO36  [TP-D45MIL]  73.61,103.89 270 top
IO37  [TP-D45MIL]  74.98,104.88 270 top
IO38  [TP-D45MIL]  76.58,105.84 270 top
J1  [HW4-SMD-2.0-90D]  145.55,207.3 270 top
J2  [HW4-SMD-2.0-90D]  145.43,221.01 270 top
J3  XH2.54-2P  [XH2.54-2P]  111.81,103 180 top
J4  [SMD26-50P-1760L450W]  149.3,36.25 90 top
J6  [SMD2X20-254P-5080L750W920H]  101.32,234.44 0 top
J7  [HR961160C]  139.7,171.27 270 top
J8  CON31-30P-A  [SMD31-30P-1090L320W100H]  59.2,39 0 top
J10  [SMD2X20-254P-5080L750W920H]  50.52,234.44 180 top
L1  10µH/±30%  [CR54]  115.93,87.12 180 top
L3  2.2µH/±30%/3.4A  [CR54]  124.26,140.64 270 top
L4  2.2µH/±30%/3.4A  [CR54]  117.65,13.87 0 top
L5  BLM18BD252SN1  [L0603]  146.08,13.61 90 top
M1  M2.5  [M2.5]  6,6 0 top
M2  M2.5  [M2.5]  149.2,6 0 top
M3  M2.5  [M2.5]  6,234 0 top
M4  M2.5  [M2.5]  149.2,234 0 top
M5  M2.5  [M2.5]  6.88,14.67 0 top
M6  M2.5  [M2.5]  140.7,5.37 0 top
M7  M2.5  [M2.5]  69.28,161.19 0 top
M8  M2.5  [M2.5]  13.81,233.13 0 top
M9  M2.5  [M2.5]  141.49,233.94 0 top
MIC  SAO-3729-M-42-008  [MIC4-SMD-3.76X2.95MM]  153.09,14.68 180 top
P1  DEBUG6  [DEBUG*6]  1.5,110.57 270 top
P4  AFC01-S06FCC-00  [SMD8-50P-740L535W]  65,68 90 top
PWR  GREEN  [CHIPLED_0805_NOOUTLINE]  115.87,55.97 180 top
PWR1  JS102011JAQN  [SMD-6-2.5MM]  151.92,85.14 90 top
Q1  MOSFET-PCHANNEL  [SOT23-3]  109.32,187.43 270 top
Q2  32.768K  [XTAL3215]  45.92,114.99 0 top
Q3  S8050  [SOT23]  127.84,63.03 0 top
Q4  S8050  [SOT23]  127.74,56.41 180 top
Q5  MOSFET-PCHANNEL  [SOT23-3]  128.52,104.5 270 top
Q6  MOSFET-PCHANNEL  [SOT23-3]  124.43,87.1 180 top
Q7  S8050  [SOT23]  107.14,92.05 180 top
Q8  600mA/40V  [SOT23-3]  128.14,100.99 90 top
Q9  600mA/40V  [SOT23-3]  123.47,104.22 0 top
Q10  MOSFET-PCHANNEL  [SOT23-3]  126.21,127.13 270 top
Q11  600mA/40V  [SOT23-3]  127.15,123.47 90 top
Q12  600mA/40V  [SOT23-3]  122.43,126.42 90 top
Q13  MOSFET-PCHANNEL  [SOT23-3]  126.26,130.99 270 top
Q14  600mA/40V  [SOT23-3]  129.26,128.75 90 top
Q15  600mA/40V  [SOT23-3]  122.48,129.84 0 top
Q16  MOSFET-PCHANNEL  [SOT23-3]  125.04,49.35 270 top
Q17  600mA/40V  [SOT23-3]  128.17,47.55 90 top
Q18  600mA/40V  [SOT23-3]  121.89,47.52 90 top
Q19  BS138  [SOT23]  127.89,25.78 90 top
Q20  BS138  [SOT23]  127.86,28.93 90 top
Q21  MOSFET-PCHANNEL  [SOT23-3]  125.32,81.53 0 top
Q22  600mA/40V  [SOT23-3]  118.34,79.6 180 top
Q23  600mA/40V  [SOT23-3]  124.03,75.9 0 top
Q24  MOSFET-PCHANNEL  [SOT23-3]  128.02,73.1 180 top
Q25  600mA/40V  [SOT23-3]  131.98,74.98 270 top
Q26  600mA/40V  [SOT23-3]  127.56,78.28 180 top
Q27  600mA/40V  [SOT23-3]  127.91,86.94 270 top
Q28  600mA/40V  [SOT23-3]  127.71,90.63 90 top
R1  10K  [DISCRETE_R0603]  58.8,57.28 180 top
R2  0R  [R0603]  122.3,62.1 270 top
R4  51K  [DISCRETE_R0603]  110.36,196.65 90 top
R5  NC  [DISCRETE_R0603]  112.67,189.94 180 top
R6  51K  [DISCRETE_R0603]  112.67,188.37 180 top
R7  51K  [DISCRETE_R0603]  113.44,196.65 90 top
R8  51K  [DISCRETE_R0603]  111.94,196.65 90 top
R9  51K  [DISCRETE_R0603]  112.67,186.84 180 top
R12  5.1K  [DISCRETE_R0603]  131.47,52.68 0 top
R13  5.1K  [DISCRETE_R0603]  131.44,50.11 0 top
R14  5.1K  [DISCRETE_R0603]  131.11,110.74 0 top
R15  5.1K  [DISCRETE_R0603]  131.17,106.1 0 top
R16  10K  [R0603]  131.75,57.25 0 top
R17  0R  [R0603]  120.7,62.13 270 top
R19  1.2K  [DISCRETE_R0603]  113.49,54.91 0 top
R20  33R  [R0603]  131.09,109.19 180 top
R21  33R  [R0603]  131.11,107.65 180 top
R22  10K  [R0603]  125.37,62.1 270 top
R23  50R  [DISCRETE_R0603]  117.37,91.16 180 top
R25  10K  [R0603]  126.87,59.69 270 top
R26  10K  [R0603]  128.69,59.69 90 top
R27  5.1K  [DISCRETE_R0603]  131.09,121.67 0 top
R28  1.2K  [R0603]  118.08,65.51 180 top
R31  NC  [DISCRETE_R0603]  106.58,88.34 90 top
R32  3.6R  [DISCRETE_R0603]  109.78,98.32 0 top
R33  3.6R  [DISCRETE_R0603]  110.67,93.68 180 top
R34  100R  [R0603]  131.44,45.09 0 top
R35  0R  [R0603]  60.99,70.51 270 top
R36  NC  [DISCRETE_R0603]  58.78,66.7 180 top
R37  NC  [DISCRETE_R0603]  58.78,68.25 180 top
R38  5.1K  [DISCRETE_R0603]  131.09,117.2 0 top
R39  10K  [DISCRETE_R0603]  108.2,88.34 270 top
R40  33R  [R0603]  131.09,120.19 180 top
R41  0R  [R0603]  123.75,149.5 0 top
R42  NC  [DISCRETE_R0603]  58.78,65.22 180 top
R43  499K/NC  [R0603]  120.22,144.27 270 top
R44  10K  [DISCRETE_R0603]  58.75,69.75 180 top
R45  33R  [R0603]  131.09,118.69 180 top
R46  NC  [R0603]  123.52,34.52 180 top
R47  NC  [DISCRETE_R0603]  58.78,63.68 180 top
R48  3.3K  [R0603]  123.72,26.54 90 top
R51  5.1K  [DISCRETE_R0603]  131.19,137.06 0 top
R53  5.1K  [DISCRETE_R0603]  131.22,132.26 0 top
R54  33R  [R0603]  131.22,135.51 180 top
R55  51K  [DISCRETE_R0603]  112.67,185.34 0 top
R56  0R  [R0603]  45.62,84.07 90 top
R57  51K  [DISCRETE_R0603]  22.33,98.17 0 top
R58  10K  [DISCRETE_R0603]  131.22,89.23 180 top
R59  4.7K  [DISCRETE_R0603]  107.34,96.27 180 top
R60  10K  [DISCRETE_R0603]  107.34,94.69 0 top
R61  1.2K  [R0603]  118.19,75.49 0 top
R62  1.2K  [R0603]  118.19,77.14 0 top
R63  0R  [R0603]  58.8,62.05 180 top
R65  33R  [R0603]  131.22,133.96 180 top
R66  10K  [R0603]  11.2,89.41 180 top
R67  100K  [R0603]  11.18,87.86 180 top
R68  0R  [R0603]  11.23,90.98 0 top
R69  10K  [DISCRETE_R0603]  106.17,189.87 180 top
R70  10K  [DISCRETE_R0603]  107.7,191.41 180 top
R71  33R  [R0603]  106.17,192.96 0 top
R72  5.1K  [DISCRETE_R0603]  131.09,98.58 0 top
R73  5.1K  [DISCRETE_R0603]  131.22,93.8 0 top
R74  0R  [R0603]  37.72,109.37 0 top
R75  0R  [R0603]  37.82,107.9 0 top
R76  0R  [R0603]  37.87,106.43 0 top
R77  0R  [R0603]  37.52,104.95 0 top
R78  0R  [R0603]  37.19,103.48 0 top
R79  0R  [R0603]  22.3,102.67 0 top
R80  0R  [R0603]  22.33,107.09 0 top
R81  0R  [R0603]  22.2,109.4 90 top
R82  0R  [R0603]  17.55,110.13 90 top
R83  0R  [R0603]  22.33,101.14 0 top
R84  0R  [R0603]  22.33,96.65 0 top
R85  33R  [R0603]  131.17,96.98 180 top
R86  33R  [R0603]  131.14,95.43 180 top
R87  1.5K  [R0603]  106.17,166.67 270 top
R88  1.5K/NC  [R0603]  104.67,166.67 270 top
R89  0R  [R0603]  46.58,95.58 0 top
R90  0R  [R0603]  46.58,94.11 0 top
R91  0R  [R0603]  46.56,92.66 0 top
R92  0R  [R0603]  50.11,90.93 90 top
R93  0R  [R0603]  50.37,88.65 0 top
R94  0R  [R0603]  51.21,87.15 0 top
R95  4.02K  [R0603]  52.78,92.1 270 top
R96  0R  [R0603]  57.84,43.61 180 top
R97  0R  [R0603]  57.84,45.19 180 top
R98  0R  [R0603]  57.84,46.74 180 top
R99  0R  [R0603]  57.89,48.23 180 top
R100  0R  [R0603]  57.86,49.73 180 top
R101  33R  [R0603]  127.46,118.72 0 top
R102  0R  [R0603]  66.34,95.33 180 top
R103  100R  [R0603]  131.44,43.56 0 top
R104  100R  [R0603]  131.44,42.06 0 top
R105  100R  [R0603]  131.44,40.54 0 top
R106  100R  [R0603]  131.44,37.54 0 top
R107  100R  [R0603]  131.44,39.04 0 top
R108  10K  [DISCRETE_R0603]  38.81,84.84 180 top
R109  0R  [R0603]  57.89,51.31 180 top
R110  33R  [R0603]  127.48,120.19 0 top
R111  33R  [R0603]  128.22,133.96 0 top
R112  33R  [R0603]  128.19,135.51 0 top
R113  5.1K  [R0603]  107.44,179.17 270 top
R114  NC/5.1K  [R0603]  108.94,179.17 90 top
R115  NC/5.1K  [R0603]  100.2,166.67 90 top
R116  5.1K  [R0603]  97.82,167.44 180 top
R117  NC/5.1K  [R0603]  101.68,166.67 90 top
R118  5.1K  [R0603]  103.2,166.67 270 top
R119  NC/5.1K  [R0603]  101.78,177.83 0 top
R120  5.1K  [R0603]  101.78,176.33 180 top
R121  6.19K  [R0603]  109.17,167 90 top
R122  5.1K  [R0603]  98.6,172.26 0 top
R123  5.1K  [R0603]  98.63,175.26 180 top
R124  0R  [R0603]  66.5,113.33 90 top
R125  0R  [R0603]  65.05,113.33 90 top
R126  0R  [R0603]  63.58,113.36 90 top
R127  0R  [R0603]  62.13,113.36 90 top
R128  0R  [R0603]  60.66,113.36 90 top
R129  0R  [R0603]  108.08,195.94 0 top
R130  NC/5.1K  [R0603]  107.67,167.03 270 top
R131  NC/10K  [R0603]  111.25,176.86 180 top
R132  NC/10K  [R0603]  108.99,176.1 270 top
R133  0R  [R0603]  107.04,26.95 180 top
R134  0R  [R0603]  124.41,12.42 270 top
R135  0R  [R0603]  122.17,11.66 180 top
R136  0R  [R0603]  109.78,37.41 270 top
R137  0R  [R0603]  106.65,34.39 90 top
R138  10K/NC  [R0603]  114.6,35 270 top
R139  10K  [R0603]  113.11,35 90 top
R140  200R  [R0603]  130.71,12.19 90 top
R141  10R  [R0603]  130.48,151.26 0 top
R142  0R/NC  [R0603]  44.78,111.66 0 top
R143  10K  [R0603]  111.66,18.8 180 top
R144  0R  [R0603]  131.42,35.99 180 top
R145  100K  [R0603]  113.77,15.52 270 top
R146  22.1K  [R0603]  110.77,15.52 90 top
R147  0R  [R0603]  123.52,32.97 0 top
R148  2.2K  [R0603]  131.52,26.85 0 top
R149  NC  [DISCRETE_R0603]  125.86,35.31 90 top
R150  4.02K  [R0603]  58.72,94.31 270 top
R151  10K  [R0603]  127.33,38.68 270 top
R152  2.2K  [R0603]  130.71,15.32 270 top
R153  0R  [R0603]  44.32,107.34 180 top
R154  0R  [R0603]  44.27,105.61 180 top
R155  0R  [R0603]  110.79,12.5 90 top
R156  10K  [DISCRETE_R0603]  115.85,59.33 270 top
R157  10K  [DISCRETE_R0603]  113.08,68.12 180 top
R158  10K  [DISCRETE_R0603]  109.96,69.98 0 top
R159  10K  [DISCRETE_R0603]  106.88,68.45 0 top
R160  NC  [DISCRETE_R0603]  109.96,68.45 0 top
R161  NC  [DISCRETE_R0603]  106.91,69.98 0 top
R162  2.2K  [R0603]  133.83,13.79 90 top
R163  0R  [R0603]  133.07,11.51 0 top
R164  10K  [R0603]  125.96,15.44 90 top
R165  150K  [R0603]  129.01,15.42 90 top
R166  150K  [R0603]  131.24,17.7 180 top
R167  0R  [R0603]  131.27,19.23 0 top
R168  0R  [R0603]  131.27,23.7 0 top
R169  499K/NC  [R0603]  119.46,147.78 0 top
R170  0R  [R0603]  123.67,16.21 0 top
R171  0R  [R0603]  14.27,90.98 180 top
R172  10K  [DISCRETE_R0603]  125.4,100.23 90 top
R173  51K  [DISCRETE_R0603]  125.98,106.22 270 top
R174  10K  [DISCRETE_R0603]  122.66,123.47 0 top
R175  51K  [DISCRETE_R0603]  119.74,125.68 90 top
R176  10K  [DISCRETE_R0603]  130.28,125.58 90 top
R177  51K  [DISCRETE_R0603]  121.72,132.36 0 top
R178  1.5K  [R0603]  111.48,166.27 0 top
R179  1.5K  [R0603]  98.63,173.76 0 top
R180  10K  [DISCRETE_R0603]  124.74,45.8 90 top
R181  51K  [DISCRETE_R0603]  120.04,50.32 0 top
R182  3.3K  [R0603]  125.17,28.14 270 top
R183  2.2K  [R0603]  131.5,29.87 0 top
R185  0R  [R0603]  110.57,65.81 90 top
R186  51K  [DISCRETE_R0603]  22.33,99.67 0 top
R187  51K  [DISCRETE_R0603]  22.3,104.14 0 top
R188  51K  [DISCRETE_R0603]  22.33,105.61 0 top
R189  51K  [DISCRETE_R0603]  20.65,109.4 90 top
R190  51K  [DISCRETE_R0603]  19.1,110.13 90 top
R191  10K  [DISCRETE_R0603]  120.98,79.27 270 top
R192  51K  [DISCRETE_R0603]  123.6,78.66 0 top
R193  10K  [DISCRETE_R0603]  130.2,78.49 270 top
R194  51K  [DISCRETE_R0603]  128.22,75.69 0 top
R195  51K  [DISCRETE_R0603]  124.36,89.84 0 top
R196  NC  [R0603]  128.07,145.72 90 top
R197  2.2K  [R0603]  131.5,25.3 0 top
R198  2.2K  [R0603]  131.52,28.35 0 top
RST  TS24CA  [2*4*3.5MM]  152.5,60.92 270 top
SD  [9P-SMD-W/-RING]  139.73,189.6 0 top
SPK  1X2P  [1X2P-SMT1.25MM]  150.39,22.1 90 top
U1  ESP32-C6-MINI-1  [ESP32-C6-MINI-1]  11.23,99.34 90 top
U2  RY3730  [SOT23-6]  110.9,90.42 270 top
U3  CH340K  [ESOP-10-EP-150MIL]  123.24,56.06 90 top
U5  SPX3819  [SOT23-5]  103.61,88.54 0 top
U6  TP4056  [SOP8-1.27P]  119.74,70.46 90 top
U7  AMS1117-3.3V  [SOT89]  107.06,17.48 90 top
U8  ESP32-P4  [QFN105-35P-500L500W]  55.22,103.17 0 top
U9  W25Q128JV  [SOIC-8-208MIL]  43.66,88.93 0 top
U10  SPX3819  [SOT23-5]  110.79,22.05 0 top
U11  TLV62569DBVR  [SOT23-5-95P-300L300W]  115.44,18.64 180 top
U12  ES8311  [QFN20-40P-300L300W55H]  112.06,30.23 270 top
U13  IP101GRI  [QFN32-40P-400W400L]  104.04,172.24 270 top
U14  SPX3819  [SOT23-5]  106.15,61.72 0 top
U15  SPX3819  [SOT23-5]  109.68,61.72 0 top
U16  SPX3819  [SOT23-5]  113.26,61.72 0 top
U17  TLV62569DBVR  [SOT23-5-95P-300L300W]  123.55,146.48 90 top
U20  NS4150B  [MSOP8-65P-490L300W110H]  127.58,20.5 90 top
U$1  [MAKERFABS_0.3]  9.7,167.69 90 top
UN  [TP_4545]  18.29,96.72 90 top
UP  [TP_4545]  18.29,98.96 90 top
USB-CDC/JTAG  [USB-C-16P-5]  146.96,120.85 90 top
USB-DEVICE  [USB-C-16P-5]  146.96,96.53 90 top
USB-NATIVE  [USB-C-16P-5]  147.01,108.57 90 top
USB-OTG  [USB-C-16P-5]  146.86,132.99 90 top
USB-TTL  [USB-C-16P-5]  148.38,51.46 90 top
VPWR  [TP_4545]  111.91,85.29 90 top
X1  40MHz(10ppm)  [NX3225]  51.21,116.54 270 top
X2  25MHz(10ppm)  [NX3225]  105.16,178.97 270 top
X3  24MHz  [OSC4-SMD-2.5X2.0X0.8MM]  128.27,35.41 0 top

## Library data of the parts
BAT J1 J2 MIC = Connector-new
BAT1 X1 X2 = adafruit
BOOT M1-M9 PWR1 RST SPK U2 U3 = sale
C1 C5 C9 C20-C22 C25 C27 C28 C31 C33-C45 C64 C65 C67 C71-C84 C89-C107 C109-C111 C114 C115 C118-C157 C165-C184 D1 Q3 Q4 Q7 Q19 Q20 R2 R16 R17 R20-R22 R25 R26 R28 R34 R35 R40 R41 R43 R45 R46 R48 R54 R56 R61-R63 R65-R68 R71 R74-R107 R109-R148 R150-R155 R162-R171 R178 R179 R182 R183 R185 R196-R198 = Discrete
C2-C4 C6-C8 C10-C19 C23 C24 C26 C29 C30 C32 C54 C60 C66 C68-C70 C85-C88 C108 C116 C117 C158 C185 R1 R4-R9 R12-R15 R19 R23 R27 R31-R33 R36-R39 R42 R44 R47 R51 R53 R55 R57-R60 R69 R70 R72 R73 R108 R149 R156-R161 R172-R177 R180 R181 R186-R195 = A9G
C6_BOOT C6_RST CSI_RST = SparkFun-Switches; PROD_ID: SWCH-15606
C6_EN C6_IO9 C6_U0RXD C6_U0TXD UN UP VPWR = Discrete; PARTNO: DNP
C159-C164 L5 X3 = Discrete-new
CHRG D4 DONE PWR Q2 = microbuilder
D3 D12 = diode
D+ D- IO34-IO38 = Discrete-new; PARTNO: DNP
FB1-FB5 = SparkFun-Coils; PROD_ID: NDUC-07859
J3 SD = Connector
J4 P4 U6 U9 = self
J6-J8 J10 U8 U11-U13 U17 U20 = user
L1 L3 L4 = SparkFun-Coils; PROD_ID: NDUC-11157
P1 = Makerfabs-Peter
Q1 Q5 Q6 Q10 Q13 Q16 Q21 Q24 = User-Submitted; PROD_ID: TRANS-08285
Q8 Q9 Q11 Q12 Q14 Q15 Q17 Q18 Q22 Q23 Q25-Q28 = SparkFun-DiscreteSemi; PROD_ID: TRANS-09245
U1 = ESP32-C6-MINI-1; PROD_ID: IC-19033
U5 U7 U10 U14-U16 = IC
U$1 = Logo
USB-CDC/JTAG USB-DEVICE USB-NATIVE USB-OTG USB-TTL = USBC

## Nets
3.3V: C5.1 C9.1 C16.2 C17.2 C22.1 C23.2 C24.2 C29.2 C30.2 P1.1 R1.2 R36.2 R42.2 R44.2 R47.2 R57.2 R63.2 R66.2 R67.2 R155.1 R186.2 R187.2 R188.2 R189.2 R190.2 U1.3
25M_XI: C117.2 U13.2 X2.3
25M_XO: C116.1 U13.3 X2.1
+3V3: C3.2 C18.2 C19.2 C20.1 C25.1 C27.1 C42.1 C60.2 C66.2 C159.2 C184.1 C185.2 J1.3 J2.3 J8.1 J8.2 J8.3 J8.6 P4.1 PWR.A R22.2 R48.2 R63.1 R149.2 R151.2 R156.2 R182.2 U3.7 U3.10 U5.5 U14.1 U14.3 U15.1 U15.3 U16.1 X3.1 X3.4
A3V3: C137.1 C139.2 FB3.2 R133.2 U10.5
ADCVREF: C126.2 R140.1 U12.15
AGND: C118.2 C119.2 C120.2 C121.2 C126.1 C127.1 C128.2 C131.2 C132.2 C135.2 C140.2 C141.2 C142.2 C143.2 C144.2 C146.2 C148.2 C149.1 C161.1 C162.2 C163.2 C164.2 MIC.2 MIC.3 R137.1 R139.2 R163.1 R164.1 U12.5 U12.10 U12.21 U20.7
AVDD: C121.1 R133.1 U12.11
BAT: FB2.1 R141.1
C6_EN: C1.1 C6_EN.T C6_RST.3 C6_RST.4 P1.6 R66.1 R171.2 U1.8
C6_IO2: R68.1 U1.5
C6_U0RXD: C6_U0RXD.T P1.4 U1.30
C6_U0TXD: C6_U0TXD.T P1.3 U1.31
CCLK: C87.2 J4.14 R142.1 R144.1
CODEC_CE: R138.2 R139.1 U12.20
COL: R119.2 R120.1 U13.4
CRS: R115.2 R116.1 U13.20
CSI_1V8: C31.1 C32.2 J4.16 R148.2 R183.2 R185.1 R197.2 R198.2 U15.5
CSI_2V8: C21.1 C108.2 J4.23 J4.24 U14.5
CSI_A_CLKN: J4.6 R104.2
CSI_A_CLKP: J4.7 R105.2
CSI_A_DATA0N: J4.9 R107.2
CSI_A_DATA0P: J4.10 R106.2
CSI_A_DATA1N: J4.3 R34.2
CSI_A_DATA1P: J4.4 R103.2
CSI_REXT: R150.1 U8.48
CSI_RST: C88.2 CSI_RST.3 CSI_RST.4 J4.17 R46.1 R147.2 R149.1
CSI_SCL: J4.21 Q20.2 R183.1
CSI_SDA: J4.20 Q19.2 R148.1
D+: U3.1 USB-TTL.A6 USB-TTL.B6
D-: U3.2 USB-TTL.A7 USB-TTL.B7
DACVREF: C127.2 U12.14
DSI_A_CLKN: J8.14 R98.1
DSI_A_CLKP: J8.15 R99.1
DSI_A_DATA0N: J8.11 R109.1
DSI_A_DATA0P: J8.12 R100.1
DSI_A_DATA1N: J8.17 R97.1
DSI_A_DATA1P: J8.18 R96.1
DSI_REXT: R95.1 U8.34
DTR: Q3.2 R26.2 U3.4
EN_DCDC: R196.1 U8.79 U17.1
ESP_EN: C8.2 Q4.3 R16.1 RST.2 U8.103
FB_DCDC: C151.2 R43.1 R169.2 U8.78 U17.5
FLASH_CK_A: R93.1 U9.6
FLASH_CS_A: R89.1 R108.2 U9.1
FLASH_D_A: R94.1 U9.5
FLASH_HD_A: R92.1 U9.7
FLASH_Q_A: R90.1 U9.2
FLASH_WP_A: R91.1 U9.3
GND: BAT1.- BAT.3 BAT.4 BAT.- BOOT.1 BOOT.3 BOOT.4 C1.2 C2.1 C3.1 C4.1 C5.2 C6.1 C6_BOOT.1 C6_BOOT.2 C6_RST.1 C6_RST.2 C7.1 C8.1 C9.2 C10.1 C11.1 C12.1 C13.1 C14.1 C15.1 C16.1 C17.1 C18.1 C19.1 C20.2 C21.2 C22.2 C23.1 C24.1 C25.2 C26.1 C27.2 C28.2 C29.1 C30.1 C31.2 C32.1 C34.2 C35.1 C36.1 C37.2 C38.2 C39.2 C40.2 C41.2 C42.2 C43.1 C44.2 C45.2 C54.1 C60.1 C64.2 C65.2 C66.1 C67.1 C69.2 C70.1 C71.2 C72.2 C73.2 C74.2 C75.2 C76.2 C77.2 C78.2 C79.2 C80.2 C81.2 C82.2 C83.2 C84.2 C85.2 C86.2 C87.1 C88.1 C89.2 C90.2 C91.2 C92.2 C93.2 C94.2 C95.2 C96.2 C97.2 C98.2 C99.2 C100.2 C101.2 C102.2 C103.2 C104.2 C105.2 C106.2 C107.2 C108.1 C109.2 C110.2 C111.2 C114.2 C115.2 C116.2 C117.1 C122.2 C123.2 C133.2 C134.2 C136.2 C137.2 C138.1 C139.1 C150.1 C152.2 C153.1 C154.2 C155.2 C156.2 C157.2 C159.1 C165.2 C166.1 C168.2 C169.1 C170.2 C171.2 C172.2 C173.2 C174.2 C175.2 C176.2 C177.2 C178.2 C179.2 C180.2 C181.2 C182.2 C183.2 C184.2 C185.1 CSI_RST.1 CSI_RST.2 D3.A D4.2 J1.4 J1.SS1 J1.SS2 J2.4 J2.SS1 J2.SS2 J4.5 J4.8 J4.13 J4.15 J4.19 J4.22 J4.25 J4.26 J6.9 J6.10 J6.25 J6.26 J6.39 J6.40 J8.4 J8.7 J8.10 J8.13 J8.16 J8.19 J8.22 J8.23 J8.32 J8.33 J10.5 J10.6 J10.13 J10.14 J10.19 J10.20 J10.29 J10.30 J10.33 J10.34 M1.1 M2.1 M3.1 M4.1 M5.1 M6.1 M7.1 M8.1 M9.1 P1.2 P4.2 P4.7 P4.8 Q7.2 R12.1 R13.1 R14.1 R15.1 R19.1 R27.1 R28.2 R31.1 R32.1 R33.1 R37.2 R38.1 R51.1 R53.1 R58.1 R60.1 R70.1 R72.1 R73.1 R95.2 R113.1 R115.1 R117.1 R119.1 R121.1 R122.1 R131.1 R137.2 R146.1 R150.2 R159.1 R161.1 R169.1 R172.1 R173.1 R174.1 R175.1 R176.1 R177.1 R178.1 R180.1 R181.1 R191.1 R192.1 R193.1 R194.1 R195.1 RST.1 RST.3 RST.4 SD.6 SD.G1 SD.G2 SD.G3 SD.G4 SPK.3 SPK.4 U1.1 U1.2 U1.11 U1.14 U1.36 U1.37 U1.38 U1.39 U1.40 U1.41 U1.42 U1.43 U1.44 U1.45 U1.46 U1.47 U1.48 U1.49.1 U1.49.2 U1.49.3 U1.49.4 U1.49.5 U1.49.6 U1.49.7 U1.49.8 U1.49.9 U1.50 U1.51 U1.52 U1.53 U2.2 U3.3 U3.EP U5.2 U6.1 U6.3 U6.9 U7.1 U8.105 U8.106 U8.107 U8.108 U8.109 U8.110 U8.111 U8.112 U8.113 U9.4 U10.2 U11.2 U13.33 U14.2 U15.2 U16.2 U17.2 USB-CDC/JTAG.GND USB-CDC/JTAG.GND2 USB-DEVICE.GND USB-DEVICE.GND2 USB-NATIVE.GND USB-NATIVE.GND2 USB-OTG.GND USB-OTG.GND2 USB-TTL.GND USB-TTL.GND2 X1.2 X1.4 X2.2 X2.4 X3.2
I2C_SCL: C134.1 P4.4 Q20.3 R42.1 R154.2 R182.1 U12.1
I2C_SDA: C133.1 P4.3 Q19.3 R47.1 R48.1 R153.2 U12.19
I2S_ASDOUT: R76.1 U12.7
I2S_DSDIN: R74.1 U12.9
I2S_LRCK: C120.1 R75.1 U12.8
I2S_MCLK: C118.1 R78.1 U12.2
I2S_SCLK: C119.1 R77.1 U12.6
IO0: C85.1 J6.23 J6.24 Q2.P$1 U8.104
IO1: C86.1 J10.21 J10.22 Q2.P$2 R142.2 U8.1
IO2: J6.21 J6.22 R46.2 U8.2
IO3: J1.1 J6.19 J6.20 U8.3
IO4: J1.2 J10.17 J10.18 U8.4
IO5: J10.15 J10.16 U8.5
IO6: J6.15 J6.16 R68.2 U8.6
IO7: J6.3 J6.4 R153.1 U8.7
IO8: J6.5 J6.6 R154.1 U8.8
IO9: R74.2 U8.10
IO9/BOOT: C6_BOOT.3 C6_BOOT.4 C6_IO9.T P1.5 U1.23
IO10: R75.2 U8.11
IO11: R76.2 U8.12
IO12: R77.2 U8.13
IO12/USB_N: U1.17 UN.T
IO13: R78.2 U8.14
IO13/USB_P: U1.18 UP.T
IO14: R79.2 U8.15
IO15: R80.2 U8.16
IO16: R81.2 U8.17
IO17: R82.2 U8.18
IO18: R83.2 U8.19
IO19: R84.2 U8.20
IO20: J2.1 J6.13 J6.14 U8.22
IO21: J2.2 J6.11 J6.12 U8.23
IO22: J10.11 J10.12 R35.1 U8.24
IO23: J6.7 J6.8 R59.2 U8.25
IO24: R101.1 U8.52
IO25: R110.1 U8.53
IO26: J6.31 J6.32 R111.1 U8.55
IO27: J10.37 J10.38 R112.1 U8.56
IO28: U8.57 U13.19
IO29: U8.58 U13.18
IO30: U8.60 U13.17
IO31: R88.1 U8.61 U13.22
IO32: J10.25 J10.26 U8.63
IO33: J6.29 J6.30 U8.64
IO34: IO34.T U8.65 U13.9
IO35: BOOT.2 IO35.T Q3.3 R22.1 U8.66 U13.8
IO36: IO36.T J10.23 J10.24 R151.1 U8.68
IO37: IO37.T J10.7 J10.8 R17.1 U8.69
IO38: IO38.T J10.9 J10.10 R2.1 U8.70
IO45: J10.39 J10.40 R71.1 U8.87
IO46: J10.35 J10.36 U8.88
IO47: J6.37 J6.38 U8.89
IO48: J6.33 J6.34 U8.90
IO49: U8.92 U13.5
IO50: U8.93 U13.10 U13.14
IO51: R131.2 R132.1 U8.94 U13.32
IO52: R87.1 U8.95 U13.23
IO53: J6.35 J6.36 R170.1 U8.97
IO54: J10.31 J10.32 R171.1 U8.98
LCD_RST: C15.2 J8.5 R1.1
LCD_VDD: C26.2 C28.1 R157.2 R158.2 R160.2 R185.2 U16.5
LED+: C11.2 C12.2 C68.2 D1.- D+.T J3.1 J8.29 J8.30 J8.31 U2.5
LED-: C68.1 D-.T J3.2 J8.24 J8.25 J8.26 J8.27 R32.2 R33.2 U2.3
MICN: C130.2 R162.1 R163.2
MICP: C129.2 C160.2 R152.1
MKF_3V1: C107.1 C109.1 U13.28
MKF_3V3: C71.1 C72.1 C73.1 C89.1 C90.1 C92.1 C99.1 C105.1 C106.1 C158.2 C161.2 C164.1 C167.1 C168.1 C169.2 FB1.2 FB4.1 J6.1 J6.2 J6.17 J6.18 L4.P$2 MIC.1 Q1.2 R41.1 R69.2 R102.1 R136.1 R138.1 R145.2 R155.2 U8.9 U8.21 U8.62 U8.75 U8.77 U8.96 U8.101
MKF_LDO_VO1: C93.1 R56.1 U8.71
MKF_LDO_VO2: C94.1 C97.1 C98.1 U8.59 U8.67 U8.72
MKF_LDO_VO3: C78.1 C79.1 C95.1 C101.1 U8.41 U8.73
MKF_LDO_VO4: C54.2 C96.1 C102.1 C103.1 R4.2 R5.2 R6.2 R7.2 R8.2 R9.2 U8.74 U8.85
MKF_VBAT: C83.1 C84.1 FB2.2 FB4.2 R16.2 U8.102
MKF_VDD_HP: C74.1 C75.1 C91.1 C104.1 C151.1 C152.1 C153.2 L3.P$2 R43.2 U8.26 U8.76 U8.91
N$2: Q4.1 R26.1
N$3: Q3.1 R25.1
N$5: R38.2 USB-CDC/JTAG.A5
N$6: R15.2 USB-NATIVE.A5
N$7: PWR.C R19.2
N$10: R13.2 USB-TTL.A5
N$11: R12.2 USB-TTL.B5
N$14: R14.2 USB-NATIVE.B5
N$17: D1.+ L1.P$2 R23.2 U2.1
N$18: R27.2 USB-CDC/JTAG.B5
N$20: R53.2 USB-OTG.A5
N$21: C34.1 C150.2 R41.2 R196.2 U17.4
N$22: C2.2 R23.1
N$23: L3.P$1 U17.3
N$24: Q7.3 R31.2 R39.1 U2.4
N$25: R51.2 USB-OTG.B5
N$26: Q22.1 Q22.3 Q23.1 R191.2
N$27: Q21.1 Q23.3 R192.2
N$28: R67.1 U1.22
N$29: Q7.1 R59.1 R60.2
N$30: R28.1 U6.2
N$31: R61.2 U6.7
N$32: R62.2 U6.6
N$33: CHRG.C R61.1
N$34: DONE.C R62.1
N$35: R73.2 USB-DEVICE.A5
N$36: C158.1 Q1.1 R69.1 R70.2 R71.2
N$37: R72.2 USB-DEVICE.B5
N$38: R144.2 X3.3
N$39: R156.1 U16.3
N$40: BAT1.+$1 BAT1.+$2 R141.2
N$41: C160.1 C163.1 L5.2
N$42: C130.1 U12.17
N$43: C162.1 L5.1 MIC.4
N$44: C167.2 R145.1 R146.2 U11.5
N$45: C122.1 C125.1 U12.12
N$46: R17.2 U3.9
N$47: C123.1 C124.1 U12.13
N$48: C124.2 R134.1
N$49: R2.2 U3.8
N$50: C125.2 R135.1
N$51: C129.1 U12.18
N$52: C131.1 C132.1 R136.2 U12.3 U12.4
N$53: C135.1 R140.2 R152.2 R162.2
N$54: C140.1 U20.2
N$55: C141.1 C142.1 C143.1 FB5.1 U20.6
N$56: C145.2 R165.1
N$57: C147.2 R166.1
N$58: C33.2 C149.2 R168.2 SPK.2
N$59: C33.1 C148.1 R167.2 SPK.1
N$60: R143.1 U11.1
N$61: Q11.1 Q11.3 Q12.1 R174.2
N$62: L4.P$1 U11.3
N$63: R89.2 U8.27
N$64: R90.2 U8.28
N$65: R91.2 U8.29
N$66: Q8.1 Q8.3 Q9.1 R172.2
N$67: R92.2 U8.31
N$68: R93.2 U8.32
N$69: R94.2 U8.33
N$70: C154.1 J7.6
N$71: R96.2 U8.35
N$72: R97.2 U8.36
N$73: R98.2 U8.37
N$74: R99.2 U8.38
N$75: R100.2 U8.39
N$76: C45.1 U5.4
N$77: C155.1 J7.5
N$78: C80.1 C81.1 C82.1 R102.2 U8.51
N$79: C156.1 J7.10
N$80: C157.1 J7.13 J7.14
N$81: J7.11 R178.2
N$82: R103.1 U8.47
N$83: R34.1 U8.46
N$84: R104.1 U8.45
N$85: R105.1 U8.44
N$86: R106.1 U8.43
N$87: R107.1 U8.42
N$88: R109.2 U8.40
N$89: J7.2 R179.1
N$90: Q5.1 Q9.3 R173.2
N$91: Q10.1 Q12.3 R175.2
N$92: Q14.1 Q14.3 Q15.1 R176.2
N$93: Q13.1 Q15.3 R177.2
N$94: Q17.1 Q17.3 Q18.1 R180.2
N$95: Q16.1 Q18.3 R181.2
N$97: Q25.1 Q25.3 Q26.1 R193.2
N$98: Q24.1 Q26.3 R194.2
N$100: Q6.1 Q28.3 R195.2
N$101: Q20.1 R198.1
N$102: R124.1 U8.80
N$103: R125.1 U8.81
N$104: R126.1 U8.82
N$105: R127.1 U8.83
N$106: R128.1 U8.84
N$107: Q19.1 R197.1
N$108: R129.1 U8.86
N$110: Q27.1 Q27.3 Q28.1 R58.2
OUTN: C146.1 C147.1 R134.2
OUTP: C144.1 C145.1 R135.2
PA_CTRL: R164.2 R170.2 U20.1
PA_INL+: R165.2 U20.3
PA_INL-: R166.2 U20.4
PA_OUTL+: R167.1 U20.8
PA_OUTL-: R168.1 U20.5
PHY_3V3: C110.1 C111.1 C114.1 C115.1 FB1.1 J7.1 R87.2 R88.2 R114.2 R116.2 R118.2 R120.2 R123.2 R130.2 R132.2 U13.13 U13.31
PHY_AD0: R123.1 R179.2 U13.11
PHY_AD3: J7.12 R122.2 U13.12
PHY_ISET: R121.2 U13.25
PHY_TESTON: R130.1 U13.24
RD+: J7.7 U13.27
RD-: J7.8 U13.26
RESET: R147.1
RTS: Q4.2 R25.2 U3.6
RXER: R117.2 R118.1 U13.21
SD1_CLK: D4.5 R5.1 R128.2 SD.5
SD1_CMD: D4.3 R4.1 R129.2 SD.3
SD1_D0: D4.6 R6.1 R124.2 SD.7
SD1_D1: R9.1 R125.2 SD.8
SD1_D2: D4.1 R7.1 R126.2 SD.1
SD1_D3: R8.1 R127.2 SD.2
SD1_VDD: C10.2 C14.2 D4.4 Q1.3 R55.1 SD.4
SD2_CLK: R83.1 R186.1 U1.25
SD2_CMD: R57.1 R84.1 U1.24
SD2_D0: R79.1 R187.1 U1.26
SD2_D1: R80.1 R188.1 U1.27
SD2_D2: R81.1 R189.1 U1.28
SD2_D3: R82.1 R190.1 U1.29
SD_DET: R55.2 SD.9
SHLR: R159.2 R160.1
STBYB: R157.1
TD+: J7.3 U13.30
TD-: J7.4 U13.29
TP_INT: P4.5 R36.1 R37.1
TP_RST: C13.2 P4.6 R35.2 R44.1
TXER: R113.2 R114.1 U13.1
UPDN: R158.1 R161.2
USB1_5V: C170.1 C171.1 Q5.3 Q8.2 USB-NATIVE.VBUS1 USB-NATIVE.VBUS2
USB1_D+: R20.1 USB-NATIVE.A6 USB-NATIVE.B6
USB1_D-: R21.1 USB-NATIVE.A7 USB-NATIVE.B7
USB1P1_N: R45.2 R101.2
USB1P1_N_2: R65.2 R111.2
USB1P1_P: R40.2 R110.2
USB1P1_P_2: R54.2 R112.2
USB2_5V: C172.1 C173.1 Q10.3 Q11.2 USB-CDC/JTAG.VBUS1 USB-CDC/JTAG.VBUS2
USB2_D+: R40.1 USB-CDC/JTAG.A6 USB-CDC/JTAG.B6
USB2_D-: R45.1 USB-CDC/JTAG.A7 USB-CDC/JTAG.B7
USB3_5V: C174.1 C175.1 Q13.3 Q14.2 USB-OTG.VBUS1 USB-OTG.VBUS2
USB3_D+: R54.1 USB-OTG.A6 USB-OTG.B6
USB3_D-: R65.1 USB-OTG.A7 USB-OTG.B7
USB4_5V: D12.C Q6.2 Q28.2 USB-DEVICE.VBUS1 USB-DEVICE.VBUS2
USB4_D+: R85.1 USB-DEVICE.A6 USB-DEVICE.B6
USB4_D-: R86.1 USB-DEVICE.A7 USB-DEVICE.B7
USB_5V: C36.2 C37.1 C38.1 C39.1 C178.1 C179.1 CHRG.A DONE.A Q5.2 Q9.2 Q10.2 Q12.2 Q13.2 Q15.2 Q16.2 Q18.2 Q21.3 Q22.2 U6.4 U6.8
USB_DM: R21.2 R86.2 U8.49
USB_DP: R20.2 R85.2 U8.50
VBAT: BAT.+ C40.1 C44.1 C180.1 C181.1 Q24.3 Q25.2 U6.5
VBUS: C4.2 C6.2 C7.2 C176.1 C177.1 Q16.3 Q17.2 USB-TTL.VBUS1 USB-TTL.VBUS2
VCC_5V: C41.1 C43.2 C64.1 C67.2 C136.1 C138.2 C165.1 C166.2 C182.1 C183.1 D12.A FB5.2 J10.1 J10.2 J10.3 J10.4 L1.P$1 PWR1.3 PWR1.3@1 Q6.3 Q27.2 R39.2 R143.2 U2.6 U5.1 U5.3 U7.3 U10.1 U10.3 U11.4 VPWR.T
VDD: C65.1 FB3.1 U7.2 U7.4
VDD_FLASH: C76.1 C77.1 C100.1 R56.2 R108.1 U8.30 U9.8
VMID: C128.1 U12.16
VPP: C35.2 D3.C PWR1.2 PWR1.2@1 Q21.2 Q23.2 Q24.2 Q26.2
XTAL_N: C70.2 U8.99 X1.3
XTAL_P: C69.1 U8.100 X1.1

## Tracks (layer width: path | path; a pad name or v marks a point on that pad's centre or on a via)
3.3V  (via drill 0.3)
  Top 0.178: v103.66,11.74 v103.66,11.73
  Top 0.406: U1.3 8.83,91 C9.1 | 8.84,87.86 C22.1 | R67.2 | 23.09,104.17 R187.2 | R190.2 20.3,110.9 | 20.3,110.9 v20.65,110.9 R189.2 | 20.3,110.9 20.68,110.52 | 109.36,11.73 C30.2 | 107.91,11.72 C16.2 | C24.2 | C17.2 | 103.68,11.71 v103.66,11.73
  Top 0.61: C9.1 C5.1 | C5.1 8.84,87.86 | C22.1 R67.2 | R66.2 C5.1 | R67.2 v10.41,85.67 | R188.2 v23.09,104.88 23.09,104.17 | P1.1 1.5,111.73 2.92,113.16 v23.09,113.16 | v39.57,57.25 v23.09,57.25 | R57.2 v23.09,98.91 R186.2 | R155.1 109.36,11.73 | C30.2 107.91,11.72 | C16.2 C24.2 | C24.2 C17.2 | C17.2 103.68,11.71 | R44.2 56.87,69.75 56.54,69.42 56.54,67.11 56.95,66.7 R36.2 R42.2 R47.2 58.04,63.67 R63.2 58.05,62.04 C29.2 58.03,60.41 C23.2 R1.2 58.01,57.25 v57.12,57.25
  Bottom 0.406: 22.76,85.67 23.04,85.67 23.09,85.72 | 22.71,110.9 23.04,110.9 23.09,110.85
  Bottom 0.61: v57.12,57.25 v39.57,57.25 | v10.41,85.67 22.76,85.67 | v23.09,113.16 23.09,111.28 | 23.09,111.28 23.09,110.85 23.09,110.52 | 23.09,86 v23.09,98.91 v23.09,104.88 23.09,110.52 | 23.09,86 23.09,85.72 23.09,85.34 | 23.09,85.34 v23.09,57.25 23.09,42.14 37.95,27.28 88.11,27.28 v103.66,11.73 | v20.65,110.9 22.71,110.9 | 23.09,111.28 22.71,110.9 | 22.71,110.9 23.09,110.52 | 23.09,86 22.76,85.67 | 22.76,85.67 23.09,85.34
25M_XI
  Top 0.178: 105.69,176.54 C117.2
  Top 0.229: U13.2 105.04,175.32 105.69,175.97 105.69,176.54
  Top 0.254: C117.2 105.68,177.59 X2.3
25M_XO
  Top 0.178: 103.35,179.16 C116.1
  Top 0.229: U13.3 104.64,175.5 103.35,176.78 103.35,179.16
  Top 0.254: C116.1 103.65,179.36 X2.1
+3V3  (via drill 0.3)  (2 unrouted)
  Top 0.254: P4.1 61.37,63.12 C184.1 | J8.3 J8.1 63.59,37.52 63.55,37.49 | J8.2 63.51,40.4 63.55,40.36
  Top 0.305: J8.6 62.2,41.17 62.59,41.55 | 62.59,41.55 63.55,41.55 | 62.59,41.55 63.63,42.6 63.63,42.24 63.02,41.63 | 63.63,37.77 63.63,37.29 63.12,37.29 63.12,37.82 63.6,38.3 | 64.64,66.7 61.16,63.22 61.16,62.08 60.98,62.08 60.98,63.2 64.52,66.73 65.2,66.73 61.57,63.09 61.57,62.31 | v98.81,58.57 C159.2
  Top 0.61: v125.86,27.38 R182.2 123.8,27.38 R48.2 | J1.3 143.64,206.3 | 143.64,206.3 v143.13,206.3 143.13,206.81 | C42.1 102.67,89.86 U5.5 93.5,89.84 89.69,86.03 89.69,59.11 | U14.1 105.2,58.66 C159.2 | C20.1 | C20.1 C25.1 | C25.1 C60.2 | C60.2 C27.1 | C27.1 C66.2 R156.2 | R156.2 117.5,58.57 C18.2 C3.2 121.08,58.6 U3.10 121.24,59.38 v120.9,59.72 | U16.1 112.31,58.64 C27.1 | U15.3 110.63,58.66 C60.2 | U15.1 108.73,58.58 C25.1 | U14.3 107.1,58.81 C20.1 | R156.2 115.85,57.04 PWR.A | U3.7 v124.24,60.35 124.24,60.98 C19.2 R22.2 | X3.4 127.23,36.07 R149.2 v125.12,36.07 | X3.1 X3.4 | X3.4 127.34,37.91 R151.2 | C159.2 v89.69,58.57 89.69,59.11 | C159.2 C20.1 | R63.1 C184.1 C185.2 v61.37,58.57 61.37,55.35 63.55,53.16 63.55,41.55 63.55,40.36 63.55,37.49 63.55,37.41 | 89.69,59.11 90.22,58.57 | J2.3 143.78,220.01 143.13,219.35 143.13,206.81 | 143.13,206.81 143.64,206.3 | 119.3,58.62 119.81,58.62 v120.9,59.72 | v120.9,59.72 120.9,58.98 120.6,58.67
  Bottom 0.61: v89.69,58.57 v61.37,58.57 | v125.86,27.38 125.86,35.33 v125.12,36.07 121.31,36.07 v98.81,58.57 | v120.9,59.72 123.61,59.72 v124.24,60.35 138.41,74.51 138.41,201.57 v143.13,206.3
A3V3
  Top 0.813: R133.2 106.27,26.44 106.76,25.96 C139.2 C137.1 106.77,23.35 FB3.2 U10.5
ADCVREF  (via drill 0.3)
  Top 0.229: U12.15 112.86,27.95 v113.46,27.36 C126.2
  Top 0.254: v130.71,9.75 R140.1
  Bottom 0.229: v130.71,9.75 123.22,9.75 122.25,10.72 122.25,14.88 113.46,23.67 v113.46,27.36
AGND  (via drill 0.3)  (2 unrouted)
  Top 0.178: C131.2 110.16,31.73 U12.5 111.27,31.18 111.43,31.01 111.43,30.86 U12.21 111.66,29.82 111.51,29.82 111.11,29.43 U12.10 | 111.2,31.9 110.19,31.9 108.53,33.55 108.33,33.35 110.08,31.6 111.28,31.6
  Top 0.254: C149.1 C148.2 130.5,21.44 v130.48,21.46 | v127.25,23.57 U20.7 | v112.37,29.77 112.37,29.92 U12.21
  Top 0.406: U20.7 127.25,21.57 126.9,21.21 C142.2
  Top 0.61: C121.2 C120.2 C119.2 106.27,33.25 R137.1 C131.2 C132.2 v108.25,35.76 | C127.1 C126.1 v114.78,25.27 C128.2 119,25.27 121.64,22.63 C141.2 | MIC.3 MIC.2 152.22,15.9 C164.2 C161.1 C163.2 v147.6,15.14 C162.2 | C141.2 C143.2 C142.2 | R139.2 C118.2 v110.92,35.76 | C141.2 v120.67,21.21 | R163.1 v132.31,12.24 C135.2 | C144.2 127.28,12.98 v126.75,12.98 126.16,12.98 C146.2 R164.1 | R164.1 C140.2 | R164.1 125.98,14.66 v126.75,14.66 | 127.46,13.13 127.46,14.63 127.03,14.2 126.31,14.2 126.31,13.36 127.2,13.36 127.23,13.39 127.23,13.79 126.54,13.79
  Bottom 0.254: v130.48,21.46 129.36,21.46 v127.25,23.57
  Bottom 0.61: v114.78,25.27 114.78,27.36 v112.37,29.77 | v108.25,35.76 v110.92,35.76 | v120.67,21.21 120.67,19.68 125.7,14.66 v126.75,14.66 | v147.6,15.14 135.23,15.14 133.07,12.98 133.04,12.98 | v126.75,12.98 131.52,12.98 | 131.52,12.98 132.31,12.98 | 132.31,12.98 133.04,12.98 | 133.04,12.98 v132.31,12.24 | 131.52,12.98 132.26,12.24 v132.31,12.24 | v132.31,12.24 132.31,12.98
AVDD
  Top 0.178: 108.03,28.73 C121.1
  Top 0.229: U12.11 108.03,28.73
  Top 0.305: R133.1 C121.1
BAT
  Top 0.813: FB2.1 R141.1
C6_EN  (via drill 0.3)  (1 unrouted)
  Top 0.178: U1.8 arc-45 U1.8
  Top 0.406: U1.8 12.83,92.35 13.51,91.67 R171.2 13.51,89.43 C1.1 | R66.1 C1.1 | C1.1 14.96,89.41 C6_RST.4 18.24,89.37 | 18.24,89.37 C6_RST.3 | C6_EN.T 18.31,90.12 18.31,89.94 | 18.31,89.71 18.31,89.45 18.24,89.37 | 17.98,89.38 18.31,89.71 | 18.31,89.71 18.31,89.94 | 18.31,89.94 18.8,89.46
  Bottom 0.406: P1.6 14.2,92.38 v13.49,91.67
C6_IO2
  Top 0.406: U1.5 10.43,91.02 R68.1
C6_U0RXD
  Top 0.406: U1.30 11.23,106.35 9.88,107.7 9.14,107.7 C6_U0RXD.T P1.4
C6_U0TXD
  Top 0.406: U1.31 10.43,105.96 10.01,106.38 7.92,106.38 C6_U0TXD.T P1.3
CCLK  (via drill 0.3)
  Top 0.254: J4.14 132.49,35.5 v132.18,35.19
  Top 0.305: C87.2 v132.18,35.19 R144.1 | R142.1 44.73,110.77 46.76,110.77 v47.57,109.96